# Altium PCB EDVDU.PcbDoc
Units mil, origin at the board's own origin, x right, y up, seen from the top; angles counter-clockwise.
Board outline 3685 x 2780 mil, 2 copper layers (Top Layer, Bottom Layer); 31 components, 51 nets, 156 pads, 0 vias.
Unrouted connection lines stored in the file: 34.
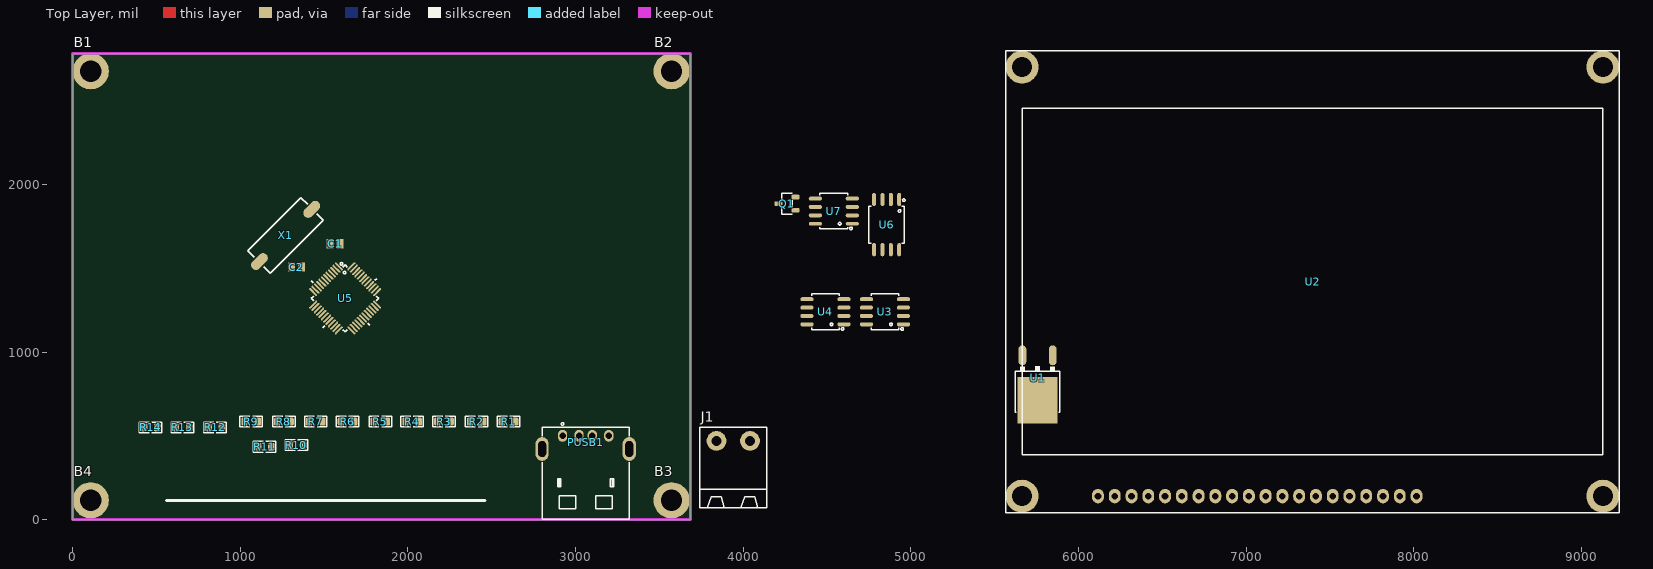
[diagram p0: Top Layer view]
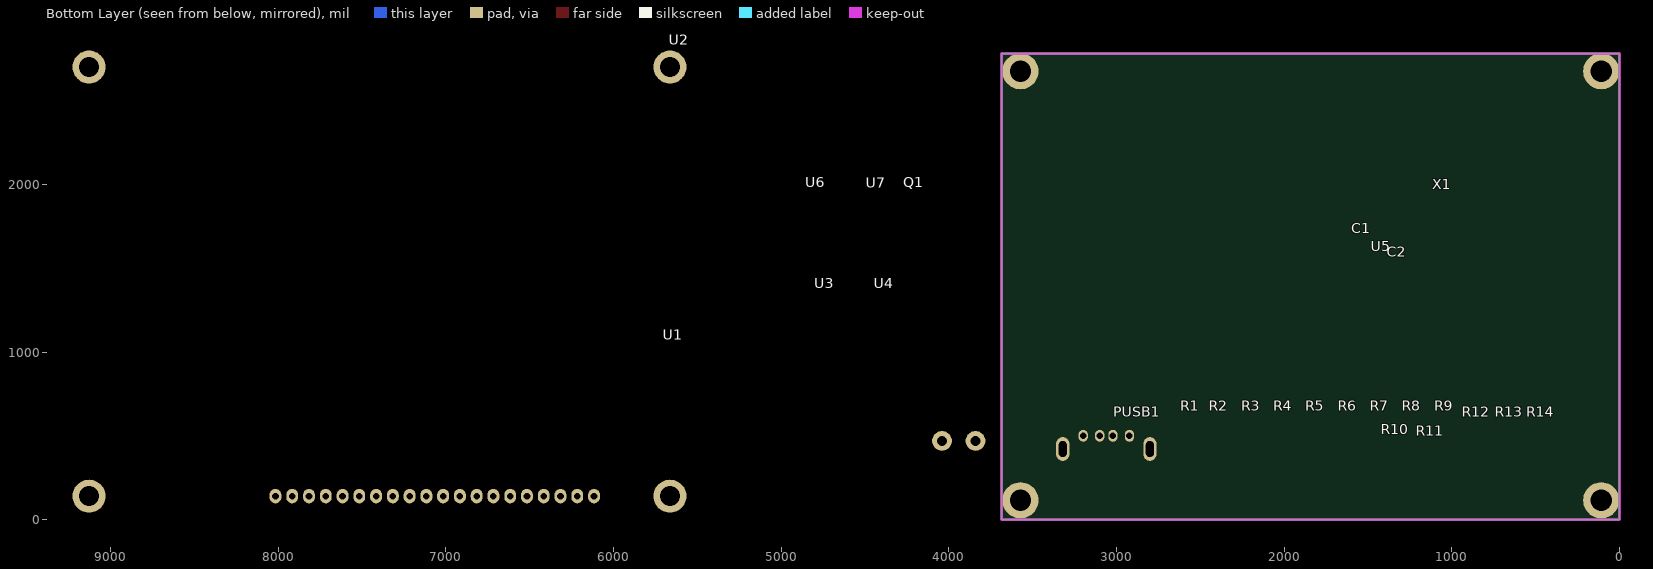
[diagram p1: Bottom Layer view, seen from below]

## Layer stack, top to bottom
Top Solder: solder mask 0.4, Solder Resist, Dk 3.5
Top Layer: signal copper 1.4
Dielectric 1: dielectric 12.6, FR-4, Dk 4.8
Bottom Layer: signal copper 1.4
Bottom Solder: solder mask 0.4, Solder Resist, Dk 3.5

## Board outline
0,0 3685,0 3685,2780 0,2780

## Design rules (kind name [scope] priority, off if disabled: settings)
Clearance [All] p1: gap=10
PolygonConnect [All] p1: connectstyle=Relief reliefconductorwidth=10 reliefentries=4 polygonreliefangle="90 Angle" airgapwidth=10
RoomDefinition EDVDU [InComponentClass('EDVDU')] p1: confinementstyle=ConfineOut formatcopy=TRUE lockcomponents=FALSE outline 4010,3475 4640,3475 4640,3835 4010,3835
RoutingVias [All] p1: holewidth=28 width=50 viastyle="Through Hole" minholewidth=28 minwidth=50 maxholewidth=28 maxwidth=50
SolderMaskExpansion [All] p1: expansion=4
Width [All] p1: maxlimit=10 minlimit=10 preferedwidth=10
30 further rules are at their usual default settings.

## Components (designator, comment, footprint, x,y, rotation, side; value= is the part's Value field where it differs from the comment)
B1 "Plated Hole" MTG320_550 107.72,2674.53 r180 top
B2 "Plated Hole" MTG320_550 3572.28,2674.53 r180 top
B3 "Plated Hole" MTG320_550 3572.28,115.47 r180 top
B4 "Plated Hole" MTG320_550 107.72,115.47 r180 top
C1 "1nF" C0805 1565,1645 r180 top
C2 "1nF" C0805 1335,1506.52 r180 top
J1 "CONN_MSTB2" MSTB_2 3940,470 r180 top
PUSB1 "CONN_USB_A" USB_A_REC_RA_THD 3060,500 r180 top
Q1 "MMBT3904" SOT23_3 4260,1885 r180 top
R1 "0R" R0805 2600,585 r180 top
R2 "0R" R0805 2410,585 r180 top
R3 "0R" R0805 2215,585 r180 top
R4 "0R" R0805 2025,585 r180 top
R5 "0R" R0805 1835,585 r180 top
R6 "0R" R0805 1640,585 r180 top
R7 "0R" R0805 1450,585 r180 top
R8 "0R" R0805 1260,585 r180 top
R9 "0R" R0805 1065,585 r180 top
R10 "0R" R0805 1335,445 r180 top
R11 "0R" R0805 1145,435 r180 top
R12 "0R" R0805 850,550 r180 top
R13 "0R" R0805 655,550 r180 top
R14 "0R" R0805 465,550 r180 top
U1 "L78M05CDT" DPAK_3 5755,980 r180 top
U2 "LCD_128X64" LCDG_128X64_BLU 7395,1420 r0 top
U3 "MCP2551" SO_8 4845,1240 r180 top
U4 "EEPROM_I2C_AT24C02_SOP8" SO_8 4490,1240 r180 top
U5 "STM32F103" QFG50_48 1625,1320 r315 top
U6 "W25Q128" SO_8_W 4855,1760 r270 top
U7 "ADM485" SO_8 4540,1840 r180 top
X1 "12MHZ" XTL_2_11X5 1270,1695 r45 top

## Footprints (in the part's own frame and the unit in brackets; to place one, negate y for a bottom-side part, rotate by r counter-clockwise, add the part's x,y. Pads: shape width x height; smd on the part's side, far side on the other; paste and mask are expansions set on the pad)
C0805 [mm] "Chip Capacitor, Body 2.0x1.3mm, IPC High Density"
  rect 1.1x1.4 smd: 1(-0.75,0) 2(0.75,0)
  body extent -1.1,-0.72 1.1,0.72, height 1.4
DPAK_3 [mm] "D-PAK (TO-252), 3-Pads, Body 6.2x6.7mm"
  oval 1.2x3 smd: 1(-2.3,0) 3(2.3,0)
  rect 6x7 smd: 4(0,6.8)
  silkscreen extent -3.4,1.63 3.4,8.6, body extent -3.37,-0.5 3.37,9.6, height 2.37
LCDG_128X64_BLU [mm] "LCD Graphic Disp, 128X64, TS12864A-2"
  oval 1.8x2.2 hole 1: 1(15.76,-32.5) 2(13.22,-32.5) 3(10.68,-32.5) 4(8.14,-32.5) 5(5.6,-32.5) 6(3.06,-32.5) 7(0.52,-32.5) 8(-2.02,-32.5) 9(-4.56,-32.5) 10(-7.1,-32.5) 11(-9.64,-32.5) 12(-12.18,-32.5) 13(-14.72,-32.5) 14(-17.26,-32.5) 15(-19.8,-32.5) 16(-22.34,-32.5) 17(-24.88,-32.5) 18(-27.42,-32.5) 19(-29.96,-32.5) 20(-32.5,-32.5)
  round 5 hole 3: MH1(-44,32.5) MH2(-44,-32.5) MH3(44,32.5) MH4(44,-32.5)
  silkscreen extent -46.5,-35 46.5,35, body extent -46.5,-35 46.5,35, height 14.6
MSTB_2 [mm] "PHOENIX MSTB 2.5/2-GF-5.08"
  round 3 hole 1.5: 1(-2.54,0) 2(2.54,0)
  silkscreen extent -5.08,-2.03 5.08,10.1, body extent -5,-2 5,10, height 8.7
MTG320_550 [mm] "Plated Through Hole: Hole Dia.=3.2mm Pad Dia.=5.5mm"
  round 5.5 hole 3.2: 1(0,0)
QFG50_48 [mm] "LQFP48, PQFF, PQFG, TSQFP, 48-Leads, Body 7.00x7.00mm, Pitch 0.50mm"
  oval 1.6x0.3 smd mask+0.075: 1(-4.1,2.75) 2(-4.1,2.25) 3(-4.1,1.75) 4(-4.1,1.25) 5(-4.1,0.75) 6(-4.1,0.25) 7(-4.1,-0.25) 8(-4.1,-0.75) 9(-4.1,-1.25) 10(-4.1,-1.75) 11(-4.1,-2.25) 12(-4.1,-2.75) 25(4.1,-2.75) 26(4.1,-2.25) 27(4.1,-1.75) 28(4.1,-1.25) 29(4.1,-0.75) 30(4.1,-0.25) 31(4.1,0.25) 32(4.1,0.75) 33(4.1,1.25) 34(4.1,1.75) 35(4.1,2.25) 36(4.1,2.75)
  oval 0.3x1.6 smd mask+0.075: 13(-2.75,-4.1) 14(-2.25,-4.1) 15(-1.75,-4.1) 16(-1.25,-4.1) 17(-0.75,-4.1) 18(-0.25,-4.1) 19(0.25,-4.1) 20(0.75,-4.1) 21(1.25,-4.1) 22(1.75,-4.1) 23(2.25,-4.1) 24(2.75,-4.1) 37(2.75,4.1) 38(2.25,4.1) 39(1.75,4.1) 40(1.25,4.1) 41(0.75,4.1) 42(0.25,4.1) 43(-0.25,4.1) 44(-0.75,4.1) 45(-1.25,4.1) 46(-1.75,4.1) 47(-2.25,4.1) 48(-2.75,4.1)
  silkscreen extent -5.5,-5.5 5.5,5.5, body extent -4.5,-4.5 4.5,4.5, height 1.5
R0805 [mm] "CHIP RESISTOR 1/8 WATT ,2.0X1.3mm, 0805, 2012"
  rrect50% 1x1.2 smd mask+0.05: 1(-1,0) 2(1,0)
  Top Layer pour cut-out: -0.5,0.8 0.5,0.8 0.5,-0.8 -0.5,-0.8
  silkscreen extent -1.7,-0.8 1.7,0.8, body extent -1.15,-0.67 1.15,0.68, height 0.76
SO_8 [mm] "SOP-8, 5x3.9mm body 1.27mm pitch, SOT96-1, M08A, S8, SOIC8, VO8, MS-012AA(JEDEC), R-8, 8S2, VOG8"
  oval 2x0.6 smd: 1(-2.8,1.905) 2(-2.8,0.635) 3(-2.8,-0.635) 4(-2.8,-1.905) 5(2.8,-1.905) 6(2.8,-0.635) 7(2.8,0.635) 8(2.8,1.905)
  silkscreen extent -2.8,-2.7 2.1,2.8, body extent -3,-2.45 3,2.45, height 1.7
SO_8_W [mm] "SOIC Width, 5x5.3mm body 0.5mm pitch, 5.28mm SOIJ"
  oval 2x0.6 smd: 1(-3.8,1.905) 2(-3.8,0.635) 3(-3.8,-0.635) 4(-3.8,-1.905) 5(3.8,-1.905) 6(3.8,-0.635) 7(3.8,0.635) 8(3.8,1.905)
  silkscreen extent -3.9,-2.7 2.8,2.8, body extent -4.05,-2.73 4.05,2.73, height 1.75
SOT23_3 [mm]
  rrect50% 1.2x0.7 smd mask+0.1: 1(-1.3,1) 2(-1.3,-1) 3(1.3,0)
  silkscreen extent -0.8,-1.6 0.8,1.6, body extent -1.32,-1.5 1.32,1.5, height 1.08
USB_A_REC_RA_THD [mm] "CONN, USB A, Receptacle, RIGHT ANGLE, THD"
  oval 1.4x1.8 hole 1: 1(3.5,0) 2(1,0) 3(-1,0) 4(-3.5,0)
  oval 2x3.6 hole 1.2 slot 2.4 at 90 deg: SH1(-6.6,2) SH2(6.6,2)
  silkscreen extent -6.6,-2 6.6,12.6, body extent -7.9,-1.2 7.9,12.5, height 6.95
XTL_2_11X5 [mm]
  oval 3x1.5 smd: 1(-5.6,0) 2(5.6,0)
  silkscreen extent -5.7,-2.4 5.7,2.4, body extent -6.4,-2.41 6.4,2.42, height 4.3

## Part data
B1 B2 B3 B4: library part PLATED_HOLE3.2_PAD5.5, "Single Terminal Socket"
C1 C2: library part CAP_SMD_MLCC, "CAP, SMD, MLCC"
J1: library part CONN_MSTB_2, "CONN, PHOENIX MSTB 2.5/2-GF-5.08"
PUSB1: library part CONN_USB_A_REC_RA_THD, "CONN, USB, A, RECEPTACLE, R/A, THD"
Q1: library part NPN_MMBT3904_SOT23, "BJT, NPN, 40v, 0.2A, SMD, SOT23"
R1 R2 R3 R4 R5 R6 R7 R8 R9 R10 R11 R12 R13 R14: library part RES_SMD, "RES, SMD"
U1: library part VREG_78M05_TO252, "REG, Linear, Fixed, 5v, 0.5A, TO-252"
U2: library part LCDG_128X64_BLU, "LCD Graphic Disp, 128X64, with KS108 Controller"
U3: library part MCP2551_SOP8, "Can, Transceiver, High Speed, 5V (VDD)"
U4: "EEPROM, I2C"
U5: library part STM32F103C8T6_QFP48, "MCU, STM32 ARM 32-bit, Cortex M3, 64KB FLASH, 20KB SRAM"
U6: library part W25Q128_SO8W, "SPI FLASH Memory, 128Mb (16M x8), 104MHz"
U7: library part ADM485_SOP8, "RS485 Transceiver, 5V, SOP-8, ±7V Ground Difference Between Devices on the Bus"
X1: library part XTL_2_HC49_SMD, "Crystal MOST POPULAR ABL HC49 PACKAGE"

## Nets (pads, with @x,y where several pads share a name; then routed paths per layer and width w, separated by ;. In a path a pad name is that pad's centre, name@x,y a point inside that pad or via, vN(x,y) a via of type N, cw(c..) or ccw(c..) an arc to the next point about the centre after c; other vN are vias at no path point)
BUZZER: U5.3
CAN_RX: U5.45
CAN_TX: U5.46
EXTI: U5.4
GLCD_CS1: R12.1 U5.30
GLCD_CS2: R13.1 U5.31
GLCD_D0: R4.1 U5.18
GLCD_D1: R5.1 U5.19
GLCD_D2: R6.1 U5.20
GLCD_D3: R7.1 U5.39
GLCD_D4: R8.1 U5.40
GLCD_D5: R9.1 U5.41
GLCD_D6: R10.1 U5.42
GLCD_D7: R11.1 U5.43
GLCD_E: R3.2 U2.6
GLCD_RS: R1.2 U2.4 U5.29
GLCD_RW: R2.2 U2.5
GND: C1.2 C2.2
I2C_SCL: U5.21
I2C_SDA: U5.22
KEYS: U5.14
LED: U5.2
NetC1_1: C1.1 U5.5 X1.2
NetC2_1: C2.1 U5.6 X1.1
NetR4_2: R4.2 U2.7
NetR5_2: R5.2 U2.8
NetR6_2: R6.2 U2.9
NetR7_2: R7.2 U2.10
NetR8_2: R8.2 U2.11
NetR9_2: R9.2 U2.12
NetR10_2: R10.2 U2.13
NetR11_2: R11.2 U2.14
NetR12_2: R12.2 U2.15
NetR13_2: R13.2 U2.16
NetR14_2: R14.2 U2.17
SPI1_MISO: U5.16
SPI1_MOSI: U5.17
SPI1_SCK: U5.15
SPI2_MISO: U5.27
SPI2_MOSI: R2.1 U5.28
SPI2_NSS: R1.1 U5.25
SPI2_SCK: R3.1 U5.26
SW_CLK: U5.37
SW_RST: R14.1 U5.38
SWDIO: U5.34
USART_CTS: U5.10
USART_RTS: U5.11
USART_RX: U5.13
USART_TX: U5.12
USB_DM: U5.32
USB_DP: U5.33
pads on no net: B1.1 B2.1 B3.1 B4.1 J1.1 J1.2 PUSB1.1 PUSB1.2 PUSB1.3 PUSB1.4 PUSB1.SH1 PUSB1.SH2 Q1.1 Q1.2 Q1.3 U1.1 U1.3 U1.4 U2.1 U2.2 U2.3 U2.18 U2.19 U2.20 U2.MH1 U2.MH2 U2.MH3 U2.MH4 U3.1 U3.2 U3.3 U3.4 U3.5 U3.6 U3.7 U3.8 U4.1 U4.2 U4.3 U4.4 U4.5 U4.6 U4.7 U4.8 U5.1 U5.7 U5.8 U5.9 U5.23 U5.24 U5.35 U5.36 U5.44 U5.47 U5.48 U6.1 U6.2 U6.3 U6.4 U6.5 U6.6 U6.7 U6.8 U7.1 U7.2 U7.3 U7.4 U7.5 U7.6 U7.7 U7.8

## Keep-outs
Keep-Out Layer:
  the board outline again, w18.11

## Silkscreen, mask and mechanical layers (free items; w line width, h text height)
Top Overlay:
  lines w18.11: 560.47,115.47 2460.47,115.47